# EAGLE board BeagleBone-Breadboard-layout-eagle (EAGLE 5.11)
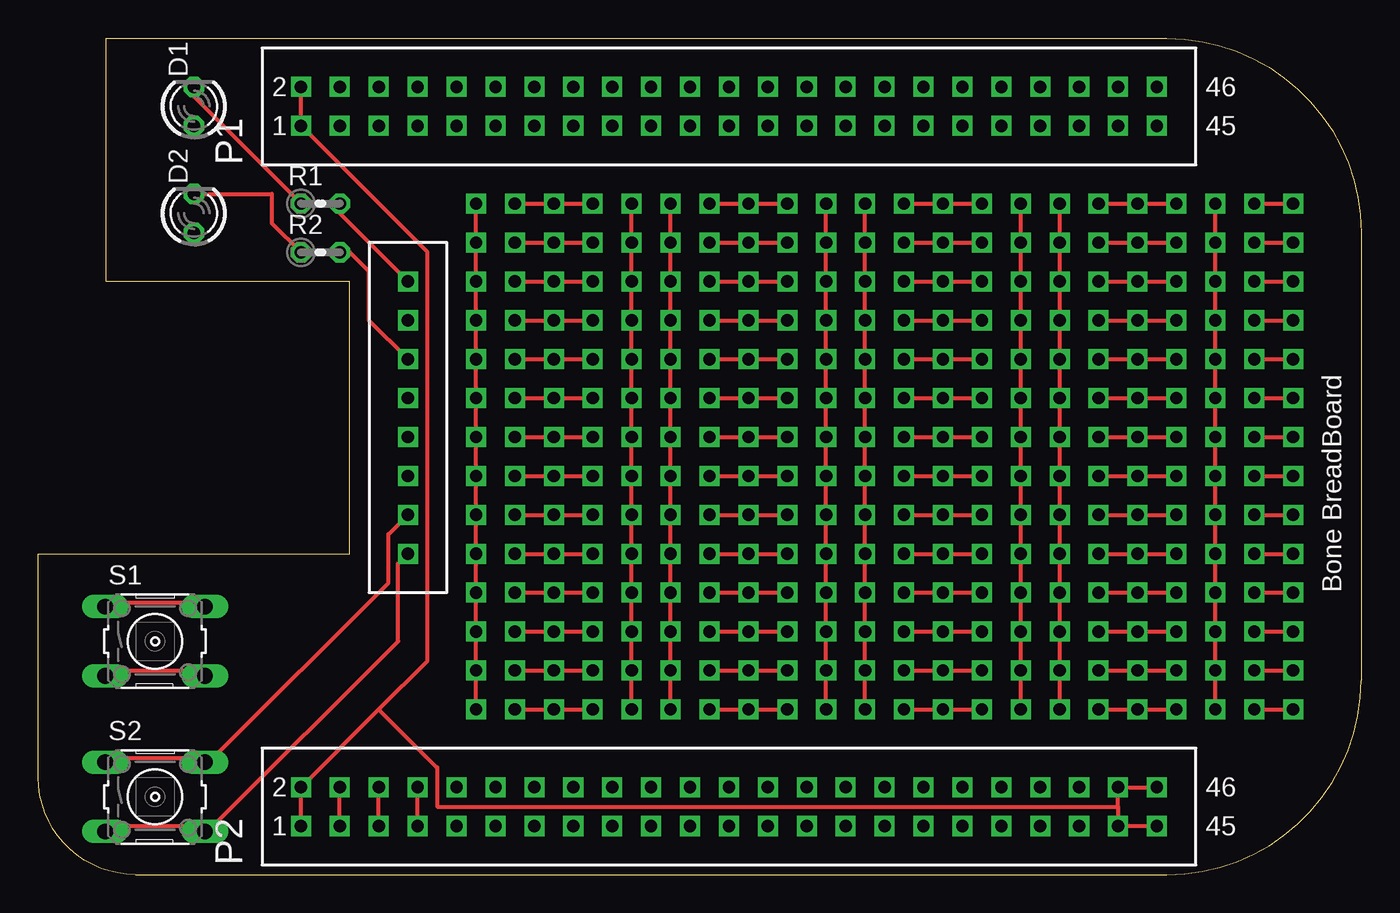
[diagram p0: board, top side]
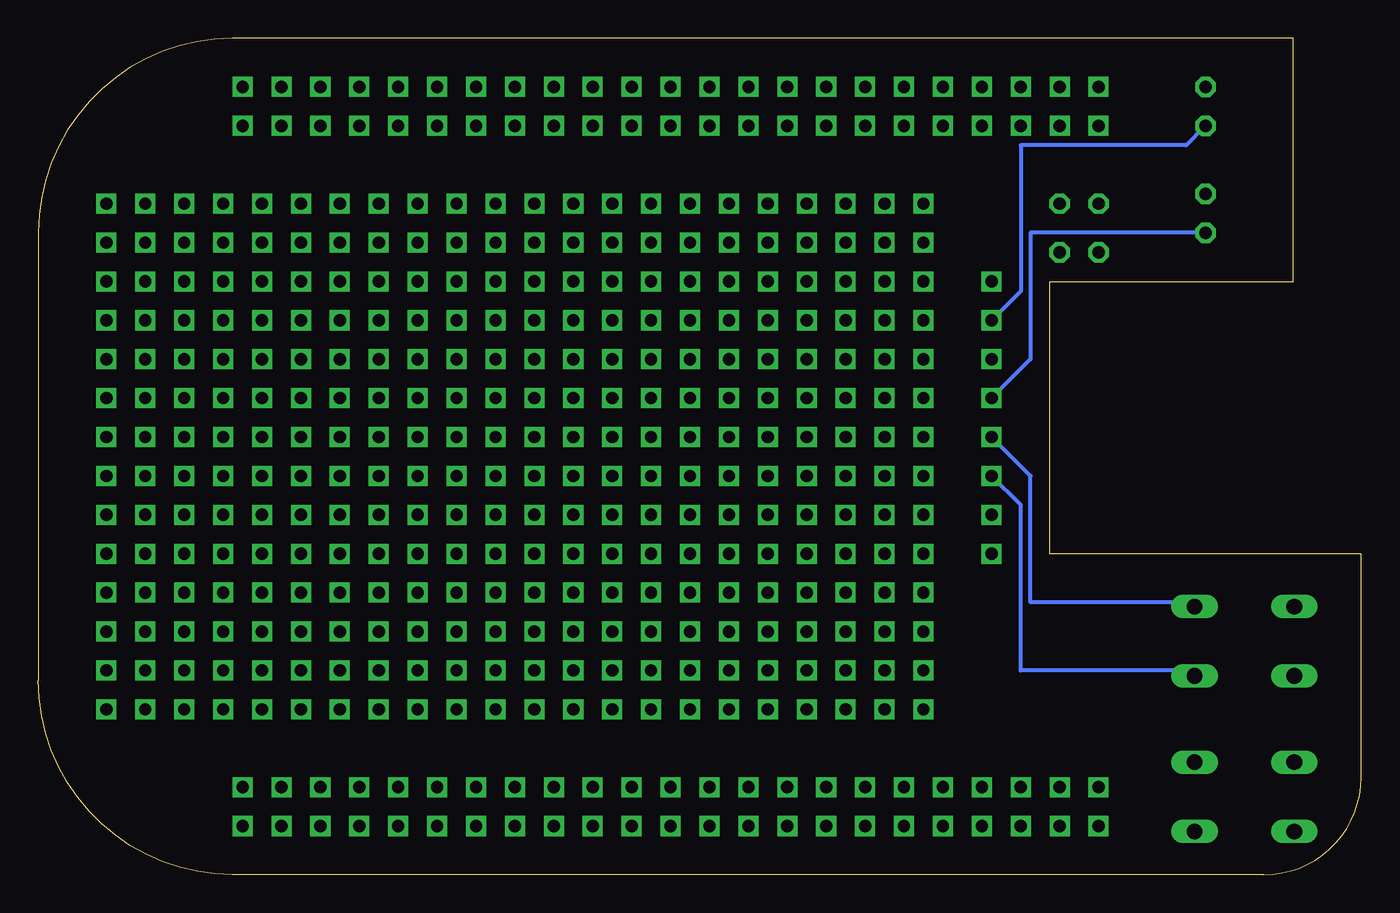
[diagram p1: board, bottom side, seen from below]

Size 86.36 x 54.61 mm. Coordinates in mm from the lower left corner, seen from the top.
Outline: 73.66,0 arc90 86.36,12.7 86.36,41.91 arc90 73.66,54.61 4.45,54.61 4.45,38.73 20.32,38.73 20.32,20.95 0,20.95 0,6.35 arc90 6.35,0 73.66,0
Copper layers (1*16): Top 0.035mm / dielectric 1.5mm / Bottom 0.035mm
Design rules "default": minimum track width 10mil, minimum drill 24mil, track to track 8mil, track to pad 8mil, pad to pad 8mil, via to via 8mil, smd to smd 8mil, copper to edge 40mil, drill to drill 8mil, minimum pad ring 10mil, minimum via ring 8mil, stop-mask expansion 4mil, vias tented up to drill 0mil, thermal gap 10mil

## Footprints (pad centres in the part's own frame; a part is rotated, then mirrored left to right if it is on the bottom)
LED3MM = drill 0.813 octagon: A -1.27,0; K 1.27,0
CONN23-2F = drill 0.8 square: 1 -1.27,27.94; 2 1.27,27.94; 3 -1.27,25.4; 4 1.27,25.4; 5 -1.27,22.86; 6 1.27,22.86; 7 -1.27,20.32; 8 1.27,20.32; 9 -1.27,17.78; 10 1.27,17.78; 11 -1.27,15.24; 12 1.27,15.24; 13 -1.27,12.7; 14 1.27,12.7; 15 -1.27,10.16; 16 1.27,10.16; 17 -1.27,7.62; 18 1.27,7.62; 19 -1.27,5.08; 20 1.27,5.08; 21 -1.27,2.54; 22 1.27,2.54; 23 -1.27,0; 24 1.27,0; 25 -1.27,-2.54; 26 1.27,-2.54; 27 -1.27,-5.08; 28 1.27,-5.08; 29 -1.27,-7.62; 30 1.27,-7.62; 31 -1.27,-10.16; 32 1.27,-10.16; 33 -1.27,-12.7; 34 1.27,-12.7; 35 -1.27,-15.24; 36 1.27,-15.24; 37 -1.27,-17.78; 38 1.27,-17.78; 39 -1.27,-20.32; 40 1.27,-20.32; 41 -1.27,-22.86; 42 1.27,-22.86; 43 -1.27,-25.4; 44 1.27,-25.4; 45 -1.27,-27.94; 46 1.27,-27.94
CONN8 = drill 0.8 square: 1 0,8.89; 2 0,6.35; 3 0,3.81; 4 0,1.27; 5 0,-1.27; 6 0,-3.81; 7 0,-6.35; 8 0,-8.89
0204V = drill 0.813 octagon: 1 -1.27,0; 2 1.27,0
B3F-10XX = drill 1.016 long: 1 -3.251,2.261; 2 3.251,2.261; 3 -3.251,-2.261; 4 3.251,-2.261
PCBHOLE28 = drill 0.8 square: 1 -5.08,15.24; 2 5.08,15.24; 3 -5.08,12.7; 4 5.08,12.7; 5 -5.08,10.16; 6 5.08,10.16; 7 -5.08,7.62; 8 5.08,7.62; 9 -5.08,5.08; 10 5.08,5.08; 11 -5.08,2.54; 12 5.08,2.54; 13 -5.08,0; 14 5.08,0; 15 -5.08,-2.54; 16 5.08,-2.54; 17 -5.08,-5.08; 18 5.08,-5.08; 19 -5.08,-7.62; 20 5.08,-7.62; 21 -5.08,-10.16; 22 5.08,-10.16; 23 -5.08,-12.7; 24 5.08,-12.7; 25 -5.08,-15.24; 26 5.08,-15.24; 27 -5.08,-17.78; 28 5.08,-17.78
PCBHOLE42 = drill 0.8 square: 1 -2.54,15.24; 2 0,15.24; 3 2.54,15.24; 4 -2.54,12.7; 5 0,12.7; 6 2.54,12.7; 7 -2.54,10.16; 8 0,10.16; 9 2.54,10.16; 10 -2.54,7.62; 11 0,7.62; 12 2.54,7.62; 13 -2.54,5.08; 14 0,5.08; 15 2.54,5.08; 16 -2.54,2.54; 17 0,2.54; 18 2.54,2.54; 19 -2.54,0; 20 0,0; 21 2.54,0; 22 -2.54,-2.54; 23 0,-2.54; 24 2.54,-2.54; 25 -2.54,-5.08; 26 0,-5.08; 27 2.54,-5.08; 28 -2.54,-7.62; 29 0,-7.62; 30 2.54,-7.62; 31 -2.54,-10.16; 32 0,-10.16; 33 2.54,-10.16; 34 -2.54,-12.7; 35 0,-12.7; 36 2.54,-12.7; 37 -2.54,-15.24; 38 0,-15.24; 39 2.54,-15.24; 40 -2.54,-17.78; 41 0,-17.78; 42 2.54,-17.78
PCBHOLE14 = drill 0.8 square: 1 0,15.24; 2 0,12.7; 3 0,10.16; 4 0,7.62; 5 0,5.08; 6 0,2.54; 7 0,0; 8 0,-2.54; 9 0,-5.08; 10 0,-7.62; 11 0,-10.16; 12 0,-12.7; 13 0,-15.24; 14 0,-17.78

## Placement (x,y rotation side)
D1  [LED3MM]  10.16,50.16 90 top
D2  [LED3MM]  10.16,43.18 90 top
P1  CONN23-2F  [CONN23-2F]  45.09,50.16 90 top
P2  CONN23-2FB  [CONN23-2F]  45.09,4.45 90 top
P3  CONN8  [CONN8]  24.13,29.84 0 top
R1  470  [0204V]  18.41,43.81 0 top
R2  470  [0204V]  18.41,40.64 0 top
S1  [B3F-10XX]  7.62,15.24 0 top
S2  [B3F-10XX]  7.62,5.08 0 top
TH1  PCBHOLE28  [PCBHOLE28]  33.66,28.57 0 top
TH2  PCBHOLE28  [PCBHOLE28]  46.35,28.57 0 top
TH3  PCBHOLE28  [PCBHOLE28]  59.05,28.57 0 top
TH4  PCBHOLE28  [PCBHOLE28]  71.75,28.57 0 top
TH5  PCBHOLE42  [PCBHOLE42]  33.66,28.57 0 top
TH6  PCBHOLE42  [PCBHOLE42]  46.35,28.57 0 top
TH7  PCBHOLE42  [PCBHOLE42]  59.05,28.57 0 top
TH8  PCBHOLE42  [PCBHOLE42]  71.75,28.57 0 top
TH9  PCBHOLE14  [PCBHOLE14]  79.38,28.57 0 top
TH10  PCBHOLE14  [PCBHOLE14]  81.92,28.57 0 top

## Library data of the parts
D1 D2 = led
P1-P3 TH1-TH10 = conn23-2f
R1 R2 = resistor
S1 S2 = switch-omron; MPN: B3F-1000; OC_FARNELL: 176432; OC_NEWARK: 36M3542

## Nets
AGND: P2.34
AIN0: P2.39
AIN1: P2.40
AIN2: P2.37
AIN3: P2.38
AIN4: P2.33
AIN5: P2.36
AIN6: P2.35
CLKOUT2: P2.41
DGND: P1.1 P1.2 P2.1 P2.2 P2.43 P2.44 P2.45 P2.46
EHRPWM1A: P2.14
EHRPWM1B: P2.16
EHRPWM2A: P1.19
EHRPWM2B: P1.13
GPIO0_7: P2.42
GPIO1_0: P1.25
GPIO1_1: P1.24
GPIO1_2: P1.5
GPIO1_3: P1.6
GPIO1_4: P1.23
GPIO1_5: P1.22
GPIO1_6: P1.3
GPIO1_7: P1.4
GPIO1_12: P1.12
GPIO1_13: P1.11
GPIO1_14: P1.16
GPIO1_15: P1.15
GPIO1_26: P1.14
GPIO1_27: P1.17
GPIO1_28: P2.12
GPIO1_29: P1.26
GPIO1_30: P1.21
GPIO1_31: P1.20
GPIO2_1: P1.18
GPIO2_6: P1.45
GPIO2_7: P1.46
GPIO2_8: P1.43
GPIO2_9: P1.44
GPIO2_10: P1.41
GPIO2_11: P1.42
GPIO2_13: P1.40
GPIO2_22: P1.27
GPIO2_23: P1.29
GPIO2_24: P1.28
GPIO2_25: P1.30
GPIO3_19: P2.27
GPIO3_21: P2.25
GPIO_12: P1.39
I2C1_SCL: P2.17
I2C1_SDA: P2.18
I2C2_SCL: P2.19
I2C2_SDA: P2.20
N$1: TH9.1 TH10.1
N$2: TH9.2 TH10.2
N$3: TH9.3 TH10.3
N$4: TH9.4 TH10.4
N$5: TH9.5 TH10.5
N$6: D1.K R1.1
N$7: TH9.6 TH10.6
N$8: TH9.7 TH10.7
N$9: D2.K R2.1
N$10: TH9.8 TH10.8
N$11: TH1.1 TH1.3 TH1.5 TH1.7 TH1.9 TH1.11 TH1.13 TH1.15 TH1.17 TH1.19 TH1.21 TH1.23 TH1.25 TH1.27
N$12: TH1.2 TH1.4 TH1.6 TH1.8 TH1.10 TH1.12 TH1.14 TH1.16 TH1.18 TH1.20 TH1.22 TH1.24 TH1.26 TH1.28
N$13: TH2.1 TH2.3 TH2.5 TH2.7 TH2.9 TH2.11 TH2.13 TH2.15 TH2.17 TH2.19 TH2.21 TH2.23 TH2.25 TH2.27
N$14: TH2.2 TH2.4 TH2.6 TH2.8 TH2.10 TH2.12 TH2.14 TH2.16 TH2.18 TH2.20 TH2.22 TH2.24 TH2.26 TH2.28
N$15: TH3.1 TH3.3 TH3.5 TH3.7 TH3.9 TH3.11 TH3.13 TH3.15 TH3.17 TH3.19 TH3.21 TH3.23 TH3.25 TH3.27
N$16: TH3.2 TH3.4 TH3.6 TH3.8 TH3.10 TH3.12 TH3.14 TH3.16 TH3.18 TH3.20 TH3.22 TH3.24 TH3.26 TH3.28
N$17: TH4.1 TH4.3 TH4.5 TH4.7 TH4.9 TH4.11 TH4.13 TH4.15 TH4.17 TH4.19 TH4.21 TH4.23 TH4.25 TH4.27
N$18: TH4.2 TH4.4 TH4.6 TH4.8 TH4.10 TH4.12 TH4.14 TH4.16 TH4.18 TH4.20 TH4.22 TH4.24 TH4.26 TH4.28
N$19: TH5.1 TH5.2 TH5.3
N$20: TH5.4 TH5.5 TH5.6
N$21: TH5.7 TH5.8 TH5.9
N$22: TH5.10 TH5.11 TH5.12
N$23: TH5.13 TH5.14 TH5.15
N$24: TH5.16 TH5.17 TH5.18
N$25: TH5.19 TH5.20 TH5.21
N$26: TH5.40 TH5.41 TH5.42
N$27: TH5.37 TH5.38 TH5.39
N$28: TH5.34 TH5.35 TH5.36
N$29: TH5.31 TH5.32 TH5.33
N$30: TH5.28 TH5.29 TH5.30
N$31: TH5.25 TH5.26 TH5.27
N$32: TH5.22 TH5.23 TH5.24
N$33: TH6.1 TH6.2 TH6.3
N$34: TH6.4 TH6.5 TH6.6
N$35: TH6.7 TH6.8 TH6.9
N$36: TH6.10 TH6.11 TH6.12
N$37: TH6.13 TH6.14 TH6.15
N$38: TH6.16 TH6.17 TH6.18
N$39: TH6.19 TH6.20 TH6.21
N$41: TH6.40 TH6.41 TH6.42
N$42: TH6.37 TH6.38 TH6.39
N$43: TH6.34 TH6.35 TH6.36
N$44: TH6.31 TH6.32 TH6.33
N$45: TH6.28 TH6.29 TH6.30
N$46: TH6.25 TH6.26 TH6.27
N$47: TH6.22 TH6.23 TH6.24
N$48: TH7.1 TH7.2 TH7.3
N$49: TH7.4 TH7.5 TH7.6
N$50: TH7.7 TH7.8 TH7.9
N$51: TH7.10 TH7.11 TH7.12
N$52: TH7.13 TH7.14 TH7.15
N$53: TH7.16 TH7.17 TH7.18
N$54: TH7.19 TH7.20 TH7.21
N$55: TH7.40 TH7.41 TH7.42
N$56: TH7.37 TH7.38 TH7.39
N$57: TH7.34 TH7.35 TH7.36
N$58: TH7.31 TH7.32 TH7.33
N$59: TH7.28 TH7.29 TH7.30
N$60: TH7.25 TH7.26 TH7.27
N$61: TH7.22 TH7.23 TH7.24
N$62: TH8.1 TH8.2 TH8.3
N$63: TH8.4 TH8.5 TH8.6
N$64: TH8.7 TH8.8 TH8.9
N$65: TH8.10 TH8.11 TH8.12
N$66: TH8.13 TH8.14 TH8.15
N$67: TH8.16 TH8.17 TH8.18
N$68: TH8.19 TH8.20 TH8.21
N$69: TH8.40 TH8.41 TH8.42
N$70: TH8.37 TH8.38 TH8.39
N$71: TH8.34 TH8.35 TH8.36
N$72: TH8.31 TH8.32 TH8.33
N$73: TH8.28 TH8.29 TH8.30
N$74: TH8.25 TH8.26 TH8.27
N$75: TH8.22 TH8.23 TH8.24
N$76: TH9.9 TH10.9
N$77: TH9.10 TH10.10
N$78: TH9.11 TH10.11
N$79: TH9.12 TH10.12
N$80: TH9.13 TH10.13
N$81: TH9.14 TH10.14
P31: P3.1 R1.2
P32: D1.A P3.2
P33: P3.3 R2.2
P34: D2.A P3.4
P35: P3.5 S1.1 S1.2
P36: P3.6 S1.3 S1.4
P37: P3.7 S2.1 S2.2
P38: P3.8 S2.3 S2.4
PWR_BUT: P2.9
SPI1_CS0: P2.28
SPI1_D0: P2.29
SPI1_D1: P2.30
SPI1_SCLK: P2.31
SYS_5V: P2.7 P2.8
SYS_RESETN: P2.10
TIMER4: P1.7
TIMER5: P1.9
TIMER6: P1.10
TIMER7: P1.8
UART1_RXD: P2.26
UART1_TXD: P2.24
UART2_RXD: P2.22
UART2_TXD: P2.21
UART3_CTSN: P1.36
UART3_RTSN: P1.34
UART3_RXD: P2.15
UART3_TXD: P2.23
UART4_CTSN: P1.35
UART4_RTSN: P1.33
UART4_RXD: P2.11
UART4_TXD: P2.13
UART5_CTSN: P1.31
UART5_RTSN: P1.32
UART5_RXD: P1.38
UART5_TXD: P1.37
VDD_3V3EXP: P2.3 P2.4
VDD_5V: P2.5 P2.6
VDD_ADC: P2.32

## Tracks (layer width: path | path; a pad name or v marks a point on that pad's centre or on a via)
DGND
  Top 0.254: 70.48,4.45 P2.44 P2.46 | 70.48,4.45 P2.43 P2.45 | P2.1 P2.2 22.23,10.79 | P1.2 P1.1 25.4,40.64 25.4,13.97 22.23,10.79 | 70.48,4.45 26.04,4.45 26.04,6.99 22.23,10.79
N$1
  Top 0.254: TH9.1 TH10.1
N$2
  Top 0.254: TH9.2 TH10.2
N$3
  Top 0.254: TH9.3 TH10.3
N$4
  Top 0.254: TH9.4 TH10.4
N$5
  Top 0.254: TH9.5 TH10.5
N$6
  Top 0.254: R1.1 10.16,50.8 D1.K
N$7
  Top 0.254: TH9.6 TH10.6
N$8
  Top 0.254: TH9.7 TH10.7
N$9
  Top 0.254: D2.K 15.24,44.45 15.24,42.55 R2.1
N$10
  Top 0.254: TH9.8 TH10.8
N$11
  Top 0.254: TH1.1 TH1.3 TH1.5 TH1.7 TH1.9 TH1.11 TH1.13 TH1.15 TH1.17 TH1.19 TH1.21 TH1.23 TH1.25 TH1.27
N$12
  Top 0.254: TH1.2 TH1.4 TH1.6 TH1.8 TH1.10 TH1.12 TH1.14 TH1.16 TH1.18 TH1.20 TH1.22 TH1.24 TH1.26 TH1.28
N$13
  Top 0.254: TH2.1 TH2.3 TH2.5 TH2.7 TH2.9 TH2.11 TH2.13 TH2.15 TH2.17 TH2.19 TH2.21 TH2.23 TH2.25 TH2.27
N$14
  Top 0.254: TH2.2 TH2.4 TH2.6 TH2.8 TH2.10 TH2.12 TH2.14 TH2.16 TH2.18 TH2.20 TH2.22 TH2.24 TH2.26 TH2.28
N$15
  Top 0.254: TH3.1 TH3.3 TH3.5 TH3.7 TH3.9 TH3.11 TH3.13 TH3.15 TH3.17 TH3.19 TH3.21 TH3.23 TH3.25 TH3.27
N$16
  Top 0.254: TH3.2 TH3.4 TH3.6 TH3.8 TH3.10 TH3.12 TH3.14 TH3.16 TH3.18 TH3.20 TH3.22 TH3.24 TH3.26 TH3.28
N$17
  Top 0.254: TH4.1 TH4.3 TH4.5 TH4.7 TH4.9 TH4.11 TH4.13 TH4.15 TH4.17 TH4.19 TH4.21 TH4.23 TH4.25 TH4.27
N$18
  Top 0.254: TH4.2 TH4.4 TH4.6 TH4.8 TH4.10 TH4.12 TH4.14 TH4.16 TH4.18 TH4.20 TH4.22 TH4.24 TH4.26 TH4.28
N$19
  Top 0.254: TH5.1 TH5.2 TH5.3
N$20
  Top 0.254: TH5.4 TH5.5 TH5.6
N$21
  Top 0.254: TH5.7 TH5.8 TH5.9
N$22
  Top 0.254: TH5.10 TH5.11 TH5.12
N$23
  Top 0.254: TH5.13 TH5.14 TH5.15
N$24
  Top 0.254: TH5.16 TH5.17 TH5.18
N$25
  Top 0.254: TH5.19 TH5.20 TH5.21
N$26
  Top 0.254: TH5.40 TH5.41 TH5.42
N$27
  Top 0.254: TH5.37 TH5.38 TH5.39
N$28
  Top 0.254: TH5.34 TH5.35 TH5.36
N$29
  Top 0.254: TH5.31 TH5.32 TH5.33
N$30
  Top 0.254: TH5.28 TH5.29 TH5.30
N$31
  Top 0.254: TH5.25 TH5.26 TH5.27
N$32
  Top 0.254: TH5.22 TH5.23 TH5.24
N$33
  Top 0.254: TH6.1 TH6.2 TH6.3
N$34
  Top 0.254: TH6.4 TH6.5 TH6.6
N$35
  Top 0.254: TH6.7 TH6.8 TH6.9
N$36
  Top 0.254: TH6.10 TH6.11 TH6.12
N$37
  Top 0.254: TH6.13 TH6.14 TH6.15
N$38
  Top 0.254: TH6.16 TH6.17 TH6.18
N$39
  Top 0.254: TH6.19 TH6.20 TH6.21
N$41
  Top 0.254: TH6.40 TH6.41 TH6.42
N$42
  Top 0.254: TH6.37 TH6.38 TH6.39
N$43
  Top 0.254: TH6.34 TH6.35 TH6.36
N$44
  Top 0.254: TH6.31 TH6.32 TH6.33
N$45
  Top 0.254: TH6.28 TH6.29 TH6.30
N$46
  Top 0.254: TH6.25 TH6.26 TH6.27
N$47
  Top 0.254: TH6.22 TH6.23 TH6.24
N$48
  Top 0.254: TH7.1 TH7.2 TH7.3
N$49
  Top 0.254: TH7.4 TH7.5 TH7.6
N$50
  Top 0.254: TH7.7 TH7.8 TH7.9
N$51
  Top 0.254: TH7.10 TH7.11 TH7.12
N$52
  Top 0.254: TH7.13 TH7.14 TH7.15
N$53
  Top 0.254: TH7.16 TH7.17 TH7.18
N$54
  Top 0.254: TH7.19 TH7.20 TH7.21
N$55
  Top 0.254: TH7.40 TH7.41 TH7.42
N$56
  Top 0.254: TH7.37 TH7.38 TH7.39
N$57
  Top 0.254: TH7.34 TH7.35 TH7.36
N$58
  Top 0.254: TH7.31 TH7.32 TH7.33
N$59
  Top 0.254: TH7.28 TH7.29 TH7.30
N$60
  Top 0.254: TH7.25 TH7.26 TH7.27
N$61
  Top 0.254: TH7.22 TH7.23 TH7.24
N$62
  Top 0.254: TH8.1 TH8.2 TH8.3
N$63
  Top 0.254: TH8.4 TH8.5 TH8.6
N$64
  Top 0.254: TH8.7 TH8.8 TH8.9
N$65
  Top 0.254: TH8.10 TH8.11 TH8.12
N$66
  Top 0.254: TH8.13 TH8.14 TH8.15
N$67
  Top 0.254: TH8.16 TH8.17 TH8.18
N$68
  Top 0.254: TH8.19 TH8.20 TH8.21
N$69
  Top 0.254: TH8.40 TH8.41 TH8.42
N$70
  Top 0.254: TH8.37 TH8.38 TH8.39
N$71
  Top 0.254: TH8.34 TH8.35 TH8.36
N$72
  Top 0.254: TH8.31 TH8.32 TH8.33
N$73
  Top 0.254: TH8.28 TH8.29 TH8.30
N$74
  Top 0.254: TH8.25 TH8.26 TH8.27
N$75
  Top 0.254: TH8.22 TH8.23 TH8.24
N$76
  Top 0.254: TH9.9 TH10.9
N$77
  Top 0.254: TH9.10 TH10.10
N$78
  Top 0.254: TH9.11 TH10.11
N$79
  Top 0.254: TH9.12 TH10.12
N$80
  Top 0.254: TH9.13 TH10.13
N$81
  Top 0.254: TH9.14 TH10.14
P31
  Top 0.254: P3.1 19.68,43.18 R1.2
P32
  Bottom 0.254: P3.2 22.23,38.1 22.23,47.62 11.43,47.62 D1.A
P33
  Top 0.254: P3.3 21.59,36.2 21.59,39.37 20.32,40.64 R2.2
P34
  Bottom 0.254: P3.4 21.59,33.66 21.59,41.91 D2.A
P35
  Top 0.254: S1.1 4.45,17.78 10.79,17.78 S1.2
  Bottom 0.254: P3.5 21.59,26.04 21.59,17.78 11.43,17.78 S1.2
P36
  Top 0.254: S1.3 4.45,13.34 10.79,13.34 S1.4
  Bottom 0.254: P3.6 22.23,24.13 22.23,13.34 11.43,13.34 S1.4
P37
  Top 0.254: P3.7 22.86,22.23 22.86,19.05 11.43,7.62 S2.2 10.79,7.62 4.45,7.62 S2.1
P38
  Top 0.254: P3.8 23.5,20.32 23.5,15.24 11.43,3.17 S2.4 10.79,3.17 4.45,3.17 S2.3
SYS_5V
  Top 0.254: P2.7 P2.8
VDD_3V3EXP
  Top 0.254: P2.3 P2.4
VDD_5V
  Top 0.254: P2.5 P2.6

## Text on the board
tPlace: 2 | 46 | 1 | 45 | Bone BreadBoard | 2 | 46 | 1 | 45